# Altium PCB PM_CPUBoard_pcb.PcbDoc
Units mm, origin at the board's own origin, x right, y up, seen from the top; angles counter-clockwise.
Board outline 130 x 70 mm, 2 copper layers (Top Layer, Bottom Layer); 117 components, 88 nets, 359 pads, 65 vias.
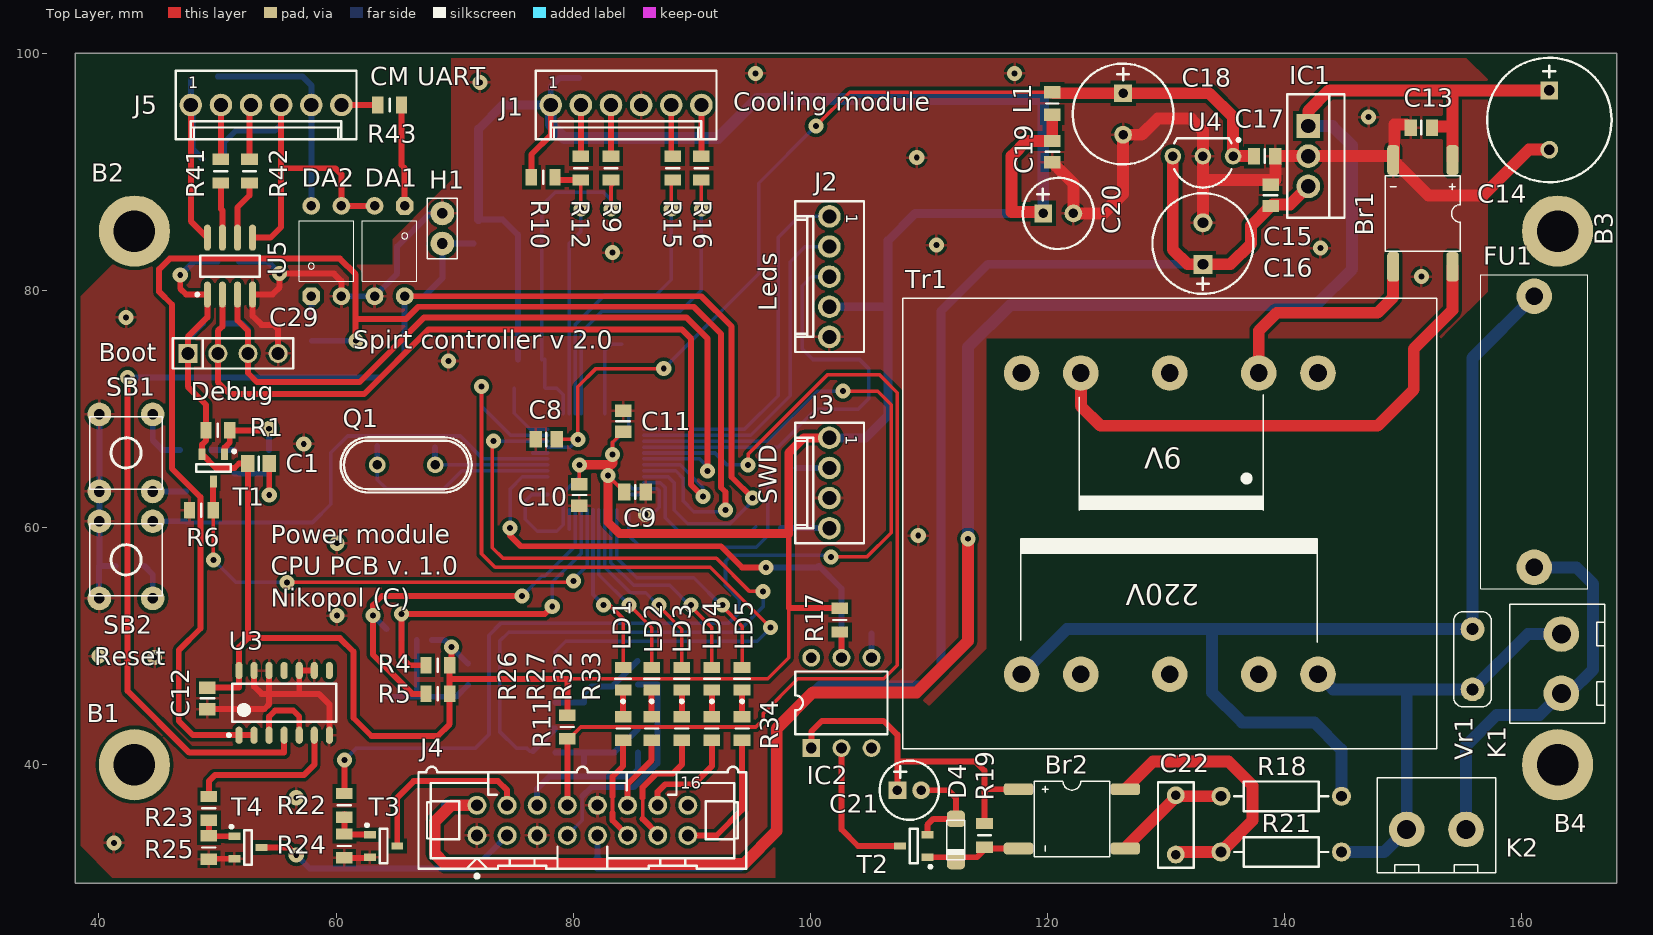
[diagram p0: Top Layer view]
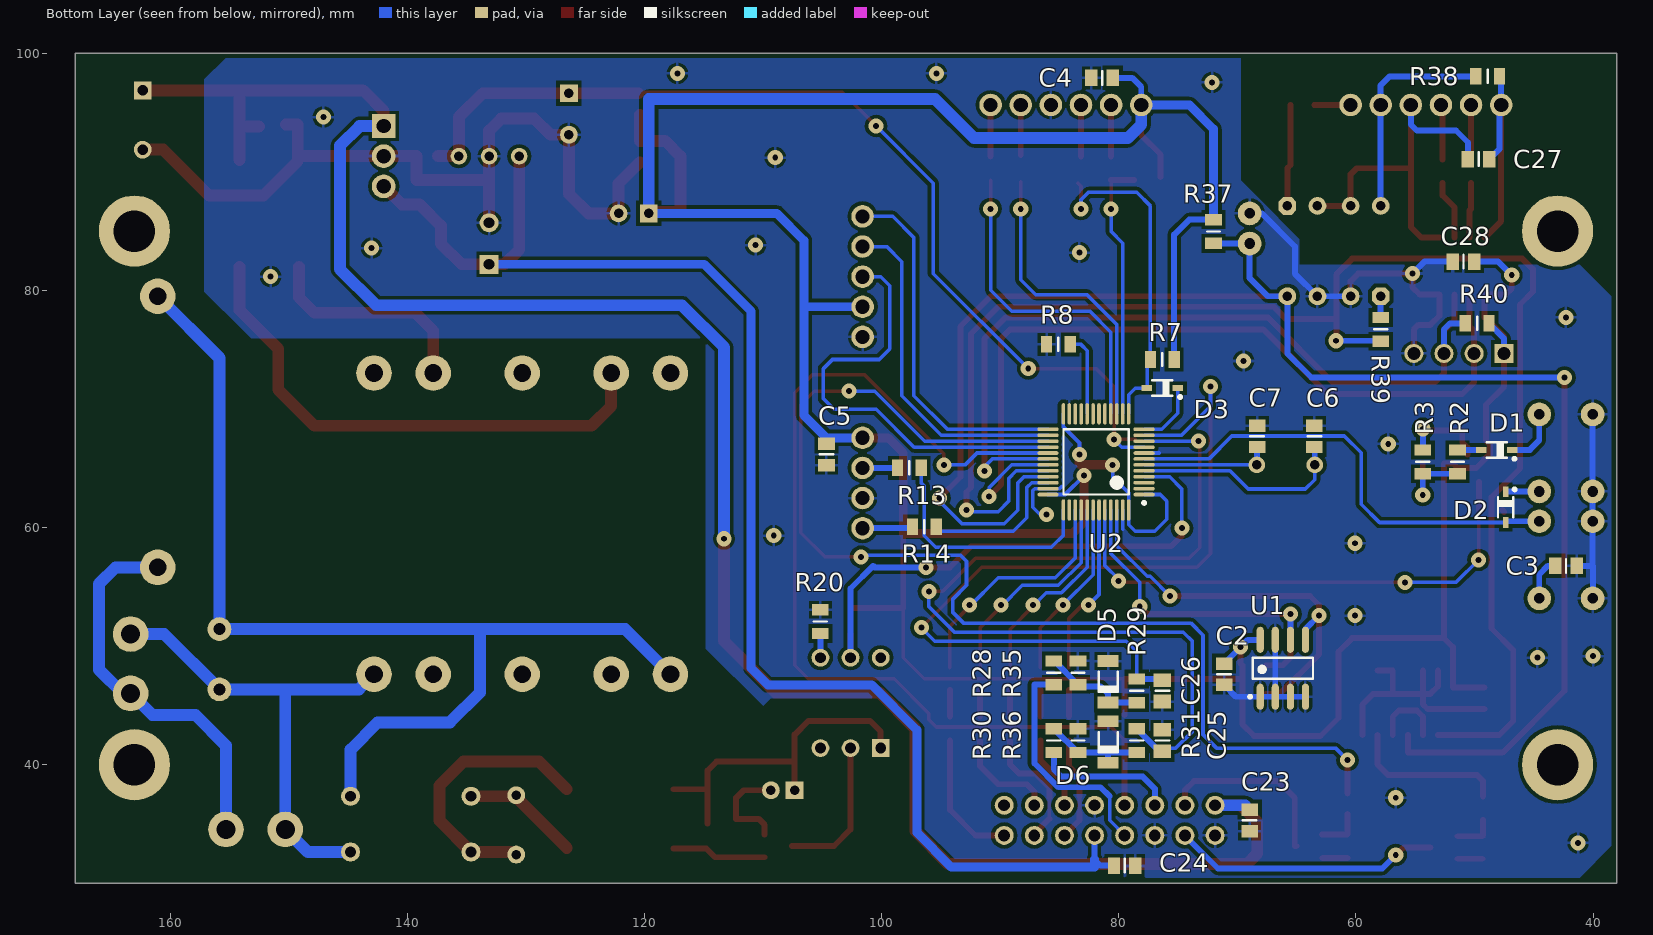
[diagram p1: Bottom Layer view, seen from below]
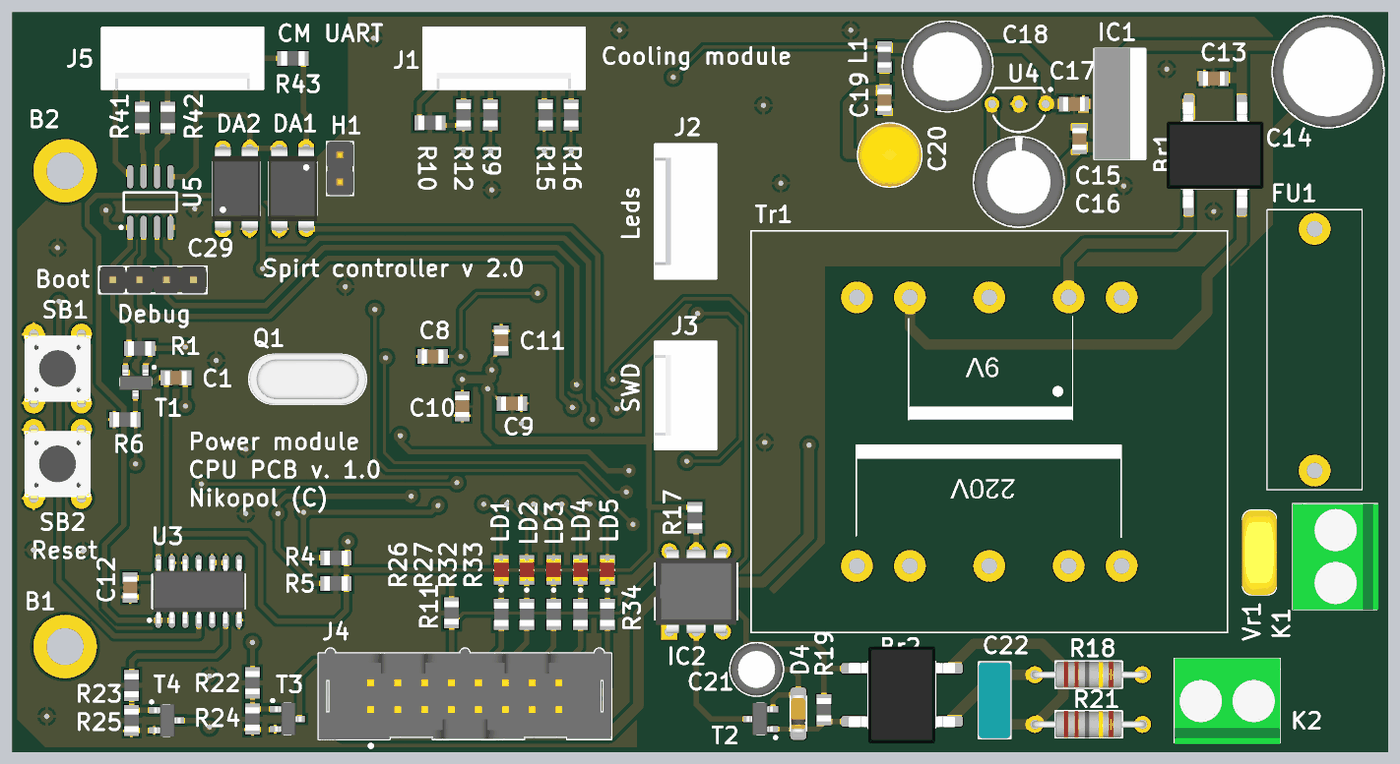
[diagram p2: 3D render of the assembled board from above, using the file's embedded part models]
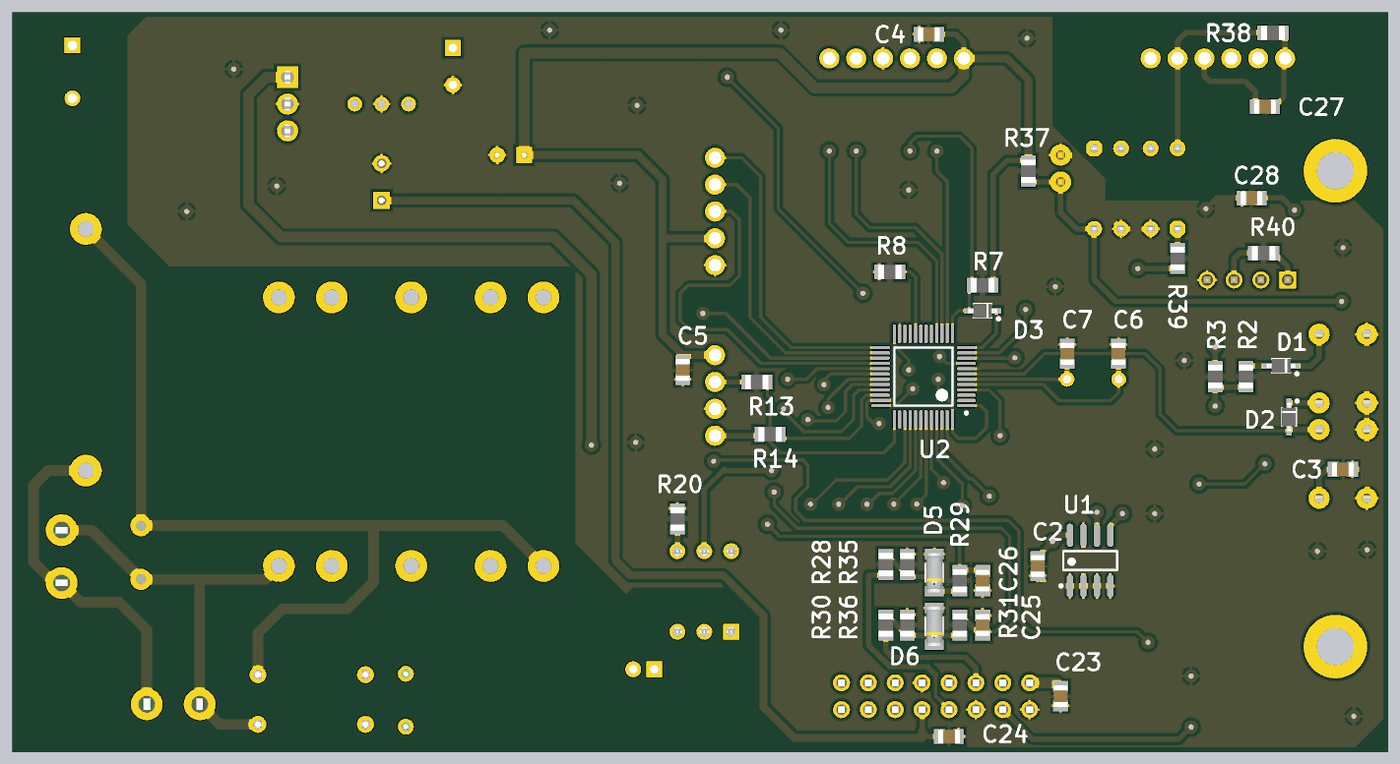
[diagram p3: 3D render of the assembled board from below, using the file's embedded part models]

## Layer stack, top to bottom
Top Solder: solder mask 0.0102, Solder Resist, Dk 3.5
Top Layer: signal copper 0.0356
Dielectric 1: dielectric 0.32, FR-4, Dk 4.8
Bottom Layer: signal copper 0.0356
Bottom Solder: solder mask 0.0102, Solder Resist, Dk 3.5

## Board outline
38,30 168,30 168,100 38,100

## Design rules (kind name [scope] priority, off if disabled: settings)
Clearance Clearance_2 [InNamedPolygon('Top Layer-GND') or  InNamedPolygon('Bottom Layer-GND')] p1: gap=0.3
Clearance Clearance_1 [HasFootprint('STM-LQFP48_N')] p2: gap=0.127
Clearance [All] p3: gap=0.2
Height [All] p1: minheight=0 maxheight=50 prefheight=12.7
HoleSize [All] p1: absolutevalues=TRUE maxlimit=6 minlimit=0.5 maxpercent=80.000 minpercent=20.000
MinimumSolderMaskSliver [All] p1: minsoldermaskwidth=0
PolygonConnect [All] p1: connectstyle=Relief reliefconductorwidth=0.254 reliefentries=4 polygonreliefangle="90 Angle" airgapwidth=0.254
RoutingVias [All] p1: holewidth=0.711 width=1.27 viastyle="Through Hole" minholewidth=0.711 minwidth=1.27 maxholewidth=0.711 maxwidth=1.27
SilkToSilkClearance [All] p1: silktosilkclearance=0
SilkToSolderMaskClearance [IsPad] p1: minsilkscreentomaskgap=0 clearancetoexposedcopper=TRUE
SolderMaskExpansion [All] p1: expansion=0.102
UnpouredPolygon [All] p1: allowunpoured=FALSE
Width [All] p1: maxlimit=5 minlimit=0.254 preferedwidth=0.254
24 further rules are at their usual default settings.

## Classes and differential pairs
component class ControlBoard_p2: Br1 Br2 C13 C14 C15 C16 C17 C18 C19 C20 C21 C22 C23 C24 C25 C26 C27 C28 C29 D4 D5 D6 DA1 DA2 FU1 IC1 IC2 J4 J5 K1 K2 L1 LD1 LD2 LD3 LD4 LD5 R17 R18 R19 R20 R21 R22 R23 R24 R25 R26 R27 R28 R29 R30 R31 R32 R33 R34 R35 R36 R37 R38 R39 R40 R41 R42 R43 T2 T3 T4 Tr1 U4 U5 Vr1
component class ControlBoard_p1: B1 B2 B3 B4 C1 C2 C3 C4 C5 C6 C7 C8 C9 C10 C11 C12 D1 D2 D3 H1 J1 J2 J3 Q1 R1 R2 R3 R4 R5 R6 R7 R8 R9 R10 R11 R12 R13 R14 R15 R16 SB1 SB2 T1 U1 U2 U3

## Components (designator, comment, footprint, x,y, rotation, side; value= is the part's Value field where it differs from the comment)
B1 "Plated Hole" MTG350_650#1 163,40 r0 top
B2 "Plated Hole" MTG350_650#2 172.72,35.052 r0 top
B3 "Plated Hole" MTG350_650#3 180.721,35.052 r0 top
B4 "Plated Hole" MTG350_650#4 188.595,35.052 r0 top
Br1 "DB104-S" DB-S 151.638,86.487 r180 top
Br2 "DB104-S" DB-S 122.047,35.433 r270 top
C1 "1uF" CAPC2012X140N 53.467,65.405 r180 top
C2 "100nF" CAPC2012X135N 71.12,47.625 r90 bottom
C3 "100nF" CAPC2012X135N 42.291,56.769 r0 bottom
C4 "100nF" CAPC2012X135N 81.407,97.917 r180 bottom
C5 "100nF" CAPC2012X135N 104.648,66.167 r90 bottom
C6 "22pF" CAPC2012X135N 63.5,67.691 r270 bottom
C7 "22pF" CAPC2012X135N 68.326,67.691 r270 bottom
C8 "100nF" CAPC2012X135N 77.724,67.437 r0 top
C9 "100nF" CAPC2012X135N 85.217,62.992 r180 top
C10 "100nF" CAPC2012X135N 80.518,62.738 r90 top
C11 "100nF" CAPC2012X135N 84.201,68.961 r270 top
C12 "100nF" CAPC2012X135N 49.149,45.593 r90 top
C13 "100nF" CAPC2012X135N 151.511,93.726 r0 top
C14 "470uF" CAPPR500-1050X2200 162.306,94.361 r270 top
C15 "100nF" CAPC2012X135N 138.811,88.011 r270 top
C16 "220uF" CAPPR350-850X1300 133.096,83.947 r90 top
C17 "100nF" CAPC2012X135N 138.303,91.313 r180 top
C18 "100uF" CAPPR350-850X800 126.365,94.869 r270 top
C19 "100nF" CAPC2012X135N 120.396,91.694 r90 top
C20 "22uF" CAPPRB254-600X990 120.904,86.487 r0 top
C21 "10uF" CAPPR200-500X1100 108.331,37.846 r0 top
C22 "10nF" CAPR500-300X720X650 130.81,34.925 r90 top
C23 "100nF" CAPC2012X135N 68.961,35.306 r90 bottom
C24 "100nF" CAPC2012X135N 79.502,31.496 r0 bottom
C25 "470nF" CAPC2012X110N 76.327,46.228 r90 bottom
C26 "470nF" CAPC2012X110N 76.327,42.037 r270 bottom
C27 "100nF" CAPC2012X135N 49.657,91.059 r0 bottom
C28 "100nF" CAPC2012X135N 50.927,82.423 r0 bottom
C29 "WE-2.54 mm Pin Header & Jumper 61300411121" 61300411121 47.498,74.676 r0 top
D1 "BAS416" SOD2512X110N 48.133,66.548 r0 bottom
D2 "BAS416" SOD2512X110N 47.371,61.722 r270 bottom
D3 "BAS416" SOD2512X110N 76.327,71.755 r0 bottom
D4 "LL4148" SOD80/MLL34 112.268,33.655 r270 top
D5 "BZV55-B3V6" DIOMELF3515N 80.899,46.99 r90 bottom
D6 "BZV55-B3V6" DIOMELF3515N 80.899,41.91 r90 bottom
DA1 "LTV817" DIL4-300a 64.516,83.312 r180 top
DA2 "LTV817" DIL4-300a 59.182,83.312 r0 top
FU1 "Fuse-PTF15" FUSE-MCH 161.036,68.072 r270 top
H1 "H-1x2" J1x2 68.961,85.217 r90 top
IC1 "LM7805CT" TO-220-V 141.986,91.313 r270 top
IC2 "4N35V" DIP6-300 102.616,45.212 r90 top
J1 "KK®" MOLEX_22-27-2061 84.455,95.631 r0 top
J2 "KK®" MOLEX_22-27-2051 101.6,81.153 r270 top
J3 "KK®" MOLEX_22-27-2041 101.6,63.754 r270 top
J4 "Header 16" 3M_N2516-6002RB 80.772,35.306 r0 top
J5 "KK®" MOLEX_22-27-2061 54.102,95.631 r0 top
K1 "TS-501 2P" "TS-501 2P-2.5" 163.322,48.514 r90 top
K2 "TS-501 2P" "TS-501 2P-2.5" 152.781,34.544 r0 top
L1 "600R@100MHz" INDC2012X110N 120.396,95.758 r270 top
LD1 "Super Red" LED_OSRAM_LSR976 84.201,47.244 r90 top
LD2 "Super Red" LED_OSRAM_LSR976 86.614,47.244 r90 top
LD3 "Super Red" LED_OSRAM_LSR976 89.154,47.244 r90 top
LD4 "Super Red" LED_OSRAM_LSR976 91.694,47.244 r90 top
LD5 "Super Red" LED_OSRAM_LSR976 94.234,47.244 r90 top
Q1 "8MHz" XTAL_HC-49/U-S 65.913,65.278 r0 top
R1 "47k" RESC2012X60N 50.038,68.199 r180 top
R2 "100" RESC2012X60N 51.435,65.532 r270 bottom
R3 "47k" RESC2012X60N 54.356,65.532 r90 bottom
R4 "4k7" RESC2012X60N 68.58,48.387 r0 top
R5 "4k7" RESC2012X60N 68.58,45.974 r0 top
R6 "4k7" RESC2012X60N 48.641,61.468 r0 top
R7 "4k7" RESC2012X60N 76.327,74.168 r180 bottom
R8 "0" RESC2012X60N 85.09,75.438 r0 bottom
R9 "220" RESC2012X60N 83.185,90.297 r270 top
R10 "4k7" RESC2012X60N 77.47,89.535 r180 top
R11 "10k" RESC2012X60N 79.502,43.18 r90 top
R12 "220" RESC2012X60N 80.645,90.297 r270 top
R13 "22" RESC2012X60N 97.663,65.024 r0 bottom
R14 "22" RESC2012X60N 96.393,60.071 r0 bottom
R15 "220" RESC2012X60N 88.392,90.297 r270 top
R16 "220" RESC2012X60N 90.805,90.297 r270 top
R17 "4k7" RESC2012X60N 102.489,52.197 r90 top
R18 "220k" RES1016-630X250 139.7,37.338 r180 top
R19 "22k" RESC2012X60N 114.681,34.036 r90 top
R20 "100" RESC2012X60N 105.156,52.07 r270 bottom
R21 "220k" RES1016-630X250 139.7,32.639 r180 top
R22 "2k7" RESC2012X60N 60.706,36.576 r90 top
R23 "2k7" RESC2012X60N 49.276,36.322 r90 top
R24 "10k" RESC2012X60N 60.706,33.147 r90 top
R25 "10k" RESC2012X60N 49.276,33.02 r90 top
R26 "100" RESC2012X60N 84.201,43.053 r90 top
R27 "100" RESC2012X60N 86.614,43.053 r90 top
R28 "1k2" RESC2012X60N 85.471,47.752 r90 bottom
R29 "5k6" RESC2012X60N 78.486,46.228 r90 bottom
R30 "1k2" RESC2012X60N 85.471,42.037 r90 bottom
R31 "5k6" RESC2012X60N 78.486,42.037 r90 bottom
R32 "100" RESC2012X60N 89.154,43.053 r90 top
R33 "100" RESC2012X60N 91.694,43.053 r90 top
R34 "100" RESC2012X60N 94.234,43.053 r90 top
R35 "2k32" RESC2012X60N 83.439,47.752 r270 bottom
R36 "2k32" RESC2012X60N 83.439,42.037 r270 bottom
R37 "4k7" RESC2012X60N 72.009,84.963 r90 bottom
R38 "4k7" RESC2012X60N 48.895,98.044 r180 bottom
R39 "330" RESC2012X60N 57.912,76.708 r270 bottom
R40 "47k" RESC2012X60N 49.784,77.216 r180 bottom
R41 "330" RESC2012X60N 50.292,90.043 r270 top
R42 "330" RESC2012X60N 52.705,90.043 r270 top
R43 "330" RESC2012X60N 64.516,95.631 r0 top
SB1 "TS-06" TS-06 42.291,66.294 r0 top
SB2 "TS-06" TS-06 42.291,57.277 r0 top
T1 "BC857B" SOT95P230X110-3N 49.657,65.024 r270 top
T2 "MMBT3904" SOT95P230X110-3N 108.712,33.147 r180 top
T3 "BC817" SOT95P230X110-3N 64.008,33.147 r0 top
T4 "BC817" SOT95P230X110-3N 52.578,33.02 r0 top
Tr1 "V42AJ-15ADP7" TR220-6W 130.302,60.325 r270 top
U1 "AT24C08BN-SP25-B" 8S1_N 66.167,48.133 r90 bottom
U2 "STM32F100C8T6B" STM-LQFP48_N 81.915,65.532 r0 bottom
U3 "SN74HC00D" D0014A_N 55.626,45.212 r90 top
U4 "LP2950ACZ-3.3" LP3 133.096,91.313 r90 top
U5 "ADUM1201ARZ" ADI-R-8_N 51.054,82.042 r90 top
Vr1 "Var 7K391" VAR-7K-200 155.829,48.895 r270 top

## Footprints (in the part's own frame and the unit in brackets; to place one, negate y for a bottom-side part, rotate by r counter-clockwise, add the part's x,y. Pads: shape width x height; smd on the part's side, far side on the other; paste and mask are expansions set on the pad)
3M_N2516-6002RB [mm] "16 Contacts - Straight .100\" x .100\" Low Profile Four-Wall Header"
  round 1.6 hole 1: 1(-8.89,-1.27) 2(-8.89,1.27) 3(-6.35,-1.27) 4(-6.35,1.27) 5(-3.81,-1.27) 6(-3.81,1.27) 7(-1.27,-1.27) 8(-1.27,1.27) 9(1.27,-1.27) 10(1.27,1.27) 11(3.81,-1.27) 12(3.81,1.27) 13(6.35,-1.27) 14(6.35,1.27) 15(8.89,-1.27) 16(8.89,1.27)
  silkscreen extent -13.82,-4.85 13.82,4.52, body extent -13.82,-4.17 13.82,4.52, height 9.65
8S1_N [mm] "SOIC, 8-Leads, Body 4.9x3.9mm, Pitch 1.27mm, IPC Medium Density"
  oval 2.2x0.6 smd: 1(-2.4,1.905) 2(-2.4,0.635) 3(-2.4,-0.635) 4(-2.4,-1.905) 5(2.4,-1.905) 6(2.4,-0.635) 7(2.4,0.635) 8(2.4,1.905)
  silkscreen extent -2.52,-2.55 0.9,2.88, body extent -1.99,-2.52 1.99,2.52, height 1.75
61300411121 [mm] "4 pins, 1 row, straight, gold plating"
  rect 1.6x1.6 hole 1.1: 1(0,0)
  round 1.6 hole 1.1: 2(2.54,0) 3(5.08,0) 4(7.62,0)
  silkscreen extent -1.27,-1.27 8.89,1.27, body extent -1.27,-1.27 8.89,1.27, height 8.54
ADI-R-8_N [mm] "SOIC, 8-Leads, Body 4.9x3.9mm, Pitch 1.27mm, IPC Medium Density"
  oval 2.2x0.6 smd: 1(-2.4,1.905) 2(-2.4,0.635) 3(-2.4,-0.635) 4(-2.4,-1.905) 5(2.4,-1.905) 6(2.4,-0.635) 7(2.4,0.635) 8(2.4,1.905)
  silkscreen extent -2.52,-2.5 0.9,2.88, body extent -2,-2.5 2,2.5, height 1.75
CAPC2012X110N [mm] "Chip Capacitor, Body 2.0x1.25mm, IPC Medium Density"
  rect 1.15x1.45 smd: 1(-0.9,0) 2(0.9,0)
  silkscreen extent 0,-0.58 0,0.58, body extent -1.05,-0.67 1.05,0.68, height 1.1
CAPC2012X135N [mm] "Chip Capacitor, Body 2.0x1.25mm, IPC Medium Density"
  rect 1.05x1.4 smd: 1(-0.9,0) 2(0.9,0)
  silkscreen extent 0,-0.58 0,0.58, body extent -1.05,-0.67 1.05,0.68, height 1.25
CAPC2012X140N [mm] "Chip Capacitor, Body 2.0x1.25mm, IPC Medium Density"
  rect 1.15x1.45 smd: 1(-0.9,0) 2(0.9,0)
  silkscreen extent 0,-0.58 0,0.58, body extent -1.05,-0.67 1.05,0.68, height 1.3
CAPPR200-500X1100 [mm] "Capacitor, Radial, Pin spacing 2.0mm - Body Diameter 5.0mm X Body Height 11mm"
  rect 1.5x1.5 hole 0.8: 1(-1,0)
  round 1.5 hole 0.8: 2(1,0)
  silkscreen extent -2.5,-2.5 2.5,2.5, body extent -2.51,-2.51 2.49,2.49, height 10.9
CAPPR350-850X800 [mm] "Capacitor, Radial, Pin spacing 3.5mm - Body Diameter 8.5mm x Body Height 8.0mm"
  rect 1.5x1.5 hole 0.8: 1(-1.75,0)
  round 1.5 hole 0.8: 2(1.75,0)
  silkscreen extent -4.25,-4.25 4.25,4.25, body extent -4.25,-4.25 4.25,4.25, height 8
CAPPR350-850X1300 [mm] "Capacitor, Radial, Pin spacing 3.5mm - Body Diameter 8.5mm x Body Height 13mm"
  rect 1.6x1.6 hole 0.9: 1(-1.75,0)
  round 1.6 hole 0.9: 2(1.75,0)
  silkscreen extent -4.25,-4.25 4.25,4.25, body extent -4.25,-4.25 4.25,4.25, height 13
CAPPR500-1050X2200 [mm] "Capacitor, Radial, Pin spacing 5.0mm - Body Diameter 10.5mm X Body Height 22mm"
  rect 1.5x1.5 hole 0.9: 1(-2.5,0)
  round 1.5 hole 0.9: 2(2.5,0)
  silkscreen extent -5.25,-5.25 5.25,5.25, body extent -5.25,-5.23 5.25,5.23, height 22
CAPPRB254-600X990 [mm] "Capacitor, Polarized Radial Bead, Pin spacing 2.54mm - Body Diameter 6.0mm X Body Height 9.9mm"
  rect 1.5x1.5 hole 0.8: 1(-1.27,0)
  round 1.5 hole 0.8: 2(1.27,0)
  silkscreen extent -3,-3 3,3, body extent -3,-2.98 3,2.98, height 9.9
CAPR500-300X720X650 [mm] "Capacitor Radial, Pin spacing 5.0mm - Body With 3.0mm X Body Length 7.2mm X Body Height 6.5mm"
  round 1.5 hole 0.8: 1(-2.5,0) 2(2.5,0)
  silkscreen extent -3.6,-1.5 3.6,1.5, body extent -3.6,-1.5 3.6,1.5, height 6.5
D0014A_N [mm] "SOIC, 14-Leads, Body 8.75x4mm, Pitch 1.27mm, IPC Medium Density"
  oval 1.45x0.6 smd: 1(-2.725,3.81) 2(-2.725,2.54) 3(-2.725,1.27) 4(-2.725,0) 5(-2.725,-1.27) 6(-2.725,-2.54) 7(-2.725,-3.81) 8(2.725,-3.81) 9(2.725,-2.54) 10(2.725,-1.27) 11(2.725,0) 12(2.725,1.27) 13(2.725,2.54) 14(2.725,3.81)
  silkscreen extent -2.85,-4.37 1.6,4.78, body extent -3.02,-4.32 3.02,4.32, height 1.59
DB-S [mm] "SMD 5mm x 9mm"
  rrect50% 1x2.5 smd: 1(-2.5,-4.5) 2(2.5,-4.5) 3(2.5,4.5) 4(-2.5,4.5)
  silkscreen extent -3.18,-3.18 3.18,3.18, body extent -4.58,-5.03 4.57,5.02, height 3.35
DIL4-300a [mm]
  oct 1.5x1.5 hole 0.8: 1(-1.27,-3.81)
  round 1.5 hole 0.8: 2(1.27,-3.81) 3(1.27,3.81) 4(-1.27,3.81)
  silkscreen extent -2.29,-2.54 2.29,2.54, body extent -2.29,-3.96 2.29,3.96, height 4.25
DIOMELF3515N [mm] "SOD80C, MELF Diode, 2-Leads, Body 3.5x1.5mm, IPC Medium Density"
  rect 1x1.75 smd: 1(-1.75,0) 2(1.75,0)
  silkscreen extent -0.85,-0.8 0.85,0.8, body extent -1.85,-0.8 1.85,0.8, height 1.6
DIP6-300 [mm] "DIP 6 Leads, Row Spacing 7.62 mm; Pitch 2.54 mm"
  rect 1.5x1.5 hole 0.9: 1(-3.81,2.54)
  round 1.5 hole 0.9: 2(-3.81,0) 3(-3.81,-2.54) 4(3.81,-2.54) 5(3.81,0) 6(3.81,2.54)
  silkscreen extent -2.65,-3.88 2.65,3.88, body extent -3.93,-3.81 3.94,3.81, height 5.33
FUSE-MCH [mm]
  round 3 hole 1.5: 1(-11.43,0) 2(11.43,0)
  silkscreen extent -13.25,-4.5 13.25,4.5, body extent -13.25,-4.5 13.25,4.5, height 15.5
INDC2012X110N [mm] "Chip Inductor, EIA 0805, Metric 2012, Body 2.0x1.2mm, IPC Medium Density"
  rect 1.05x1.4 smd: 1(-0.95,0) 2(0.95,0)
  silkscreen extent 0,-0.53 0,0.53, body extent -1,-0.62 1,0.63, height 1.1
J1x2 [mm]
  round 2 hole 0.9: 1(-1.27,0) 2(1.27,0)
  silkscreen extent -2.54,-1.27 2.54,1.27, body extent -2.54,-1.27 2.54,1.27, height 10.1
LED_OSRAM_LSR976 [mm] "Super Red Chip LED, 2-Leads, Body 2.0x1.25mm, IPC Medium Density"
  rect 0.9x1.4 smd: 1(-0.95,0) 2(0.95,0)
  silkscreen extent -2.02,-0.65 0,0.65, body extent -1.05,-0.67 1.05,0.68, height 0.9
LP3 [mm] "TO, Flat Index; 3 In-Line, Formed Axial Leads; Body Dia. 4.8mm; Leads 0.56 x 0.41 mm (max)"
  round 1.4 hole 0.8: 1(0,-2.54) 2(0,0) 3(0,2.54)
  silkscreen extent -2.65,-3.13 1.52,2.41, body extent -2.66,-2.66 1.52,2.66, height 9.33
MOLEX_22-27-2041 [mm] "2.54mm (.100\") Pitch KK® Header, Single Row, Vertical, 4 Circuits"
  round 1.9 hole 1.2: 1(-3.81,0) 2(-1.27,0) 3(1.27,0) 4(3.81,0)
  silkscreen extent -5.08,-2.88 5.08,2.92, body extent -5.08,-2.88 5.08,2.92, height 11.7
MOLEX_22-27-2051 [mm] "2.54mm (.100\") Pitch KK® Header, Single Row, Vertical, 5 Circuits"
  round 1.9 hole 1.2: 1(-5.08,0.005) 2(-2.54,0) 3(0,0) 4(2.54,0) 5(5.08,0)
  silkscreen extent -6.35,-2.88 6.35,2.92, body extent -6.35,-2.88 6.35,2.92, height 11.7
MOLEX_22-27-2061 [mm] "2.54mm (.100\") Pitch KK® Header, Single Row, Vertical, 6 Circuits"
  round 1.9 hole 1.2: 1(-6.35,0) 2(-3.81,0) 3(-1.27,0) 4(1.27,0) 5(3.81,0) 6(6.35,0)
  silkscreen extent -7.62,-2.9 7.62,2.9, body extent -7.62,-2.9 7.62,2.9, height 11.7
MTG350_650#1 [mm] "Plated Through Hole: Hole Dia.=3.5mm Pad Dia.=6.5mm"
  round 6 hole 3.5: 1(-120,0)
MTG350_650#2 [mm] "Plated Through Hole: Hole Dia.=3.5mm Pad Dia.=6.5mm"
  round 6 hole 3.5: 1(-129.72,49.948)
MTG350_650#3 [mm] "Plated Through Hole: Hole Dia.=3.5mm Pad Dia.=6.5mm"
  round 6 hole 3.5: 1(-17.721,49.948)
MTG350_650#4 [mm] "Plated Through Hole: Hole Dia.=3.5mm Pad Dia.=6.5mm"
  round 6 hole 3.5: 1(-25.595,4.948)
RES1016-630X250 [mm] "Resistor, Axial, Pad spacing 10.16 mm - Body Lengh 6.3mm X Body Diameter 2.5mm"
  round 1.6 hole 0.9: 1(-5.08,0) 2(5.08,0)
  silkscreen extent -3.95,-1.25 3.95,1.25, body extent -5.38,-1.27 5.38,1.26, height 2.51
RESC2012X60N [mm] "Chip Resistor, EIA 0805, Metric 2012, Body 2.0x1.2mm, IPC Medium Density"
  rect 0.95x1.4 smd: 1(-1,0) 2(1,0)
  silkscreen extent 0,-0.55 0,0.55, body extent -1.1,-0.67 1.1,0.68, height 0.6
SOD80/MLL34 [mil]
  rrect50% 55x60 smd: 1(-70,0) 2(70,0)
  silkscreen extent -65,-30 65,30, body extent -69,-28 69,27, height 55
SOD2512X110N [mm] "Small Outline Diode Flat Lead (SOD-323), 1.70mm W X 1.25mm L X 1.10mm H body,  IPC Medium Density"
  rect 0.9x0.5 smd: 1(-1.3,0) 2(1.3,0)
  silkscreen extent -1.62,-0.65 0.85,0.87, body extent -1.35,-0.67 1.35,0.68, height 1.1
SOT95P230X110-3N [mm] "SOT23, 3 pin, Pitch 0.95mm - 1.3mm W X 2.9mm L X 1.1mm H, IPC Medium Density"
  rect 1x0.6 smd: 1(-1.15,0.95) 2(-1.15,-0.95) 3(1.15,0)
  silkscreen extent -1.52,-1.45 0.33,1.88, body extent -1.17,-1.5 1.33,1.5, height 1.1
STM-LQFP48_N [mm] "QFP, 48-Leads, Body 7x7mm, Pitch 0.5mm, IPC Medium Density"
  oval 1.8x0.3 smd: 1(-4.05,2.75) 2(-4.05,2.25) 3(-4.05,1.75) 4(-4.05,1.25) 5(-4.05,0.75) 6(-4.05,0.25) 7(-4.05,-0.25) 8(-4.05,-0.75) 9(-4.05,-1.25) 10(-4.05,-1.75) 11(-4.05,-2.25) 12(-4.05,-2.75) 25(4.05,-2.75) 26(4.05,-2.25) 27(4.05,-1.75) 28(4.05,-1.25) 29(4.05,-0.75) 30(4.05,-0.25) 31(4.05,0.25) 32(4.05,0.75) 33(4.05,1.25) 34(4.05,1.75) 35(4.05,2.25) 36(4.05,2.75)
  oval 0.3x1.8 smd: 13(-2.75,-4.05) 14(-2.25,-4.05) 15(-1.75,-4.05) 16(-1.25,-4.05) 17(-0.75,-4.05) 18(-0.25,-4.05) 19(0.25,-4.05) 20(0.75,-4.05) 21(1.25,-4.05) 22(1.75,-4.05) 23(2.25,-4.05) 24(2.75,-4.05) 37(2.75,4.05) 38(2.25,4.05) 39(1.75,4.05) 40(1.25,4.05) 41(0.75,4.05) 42(0.25,4.05) 43(-0.25,4.05) 44(-0.75,4.05) 45(-1.25,4.05) 46(-1.75,4.05) 47(-2.25,4.05) 48(-2.75,4.05)
  silkscreen extent -4.17,-2.75 2.75,3.57, body extent -3.5,-3.5 3.5,3.5, height 1.6
TO-220-V [mm] "TO-220 3-Terminal - Vertical Mount"
  rect 2x2 hole 1.2: 1(-2.54,0)
  round 2 hole 1.2: 2(0,0) 3(2.54,0)
  silkscreen extent -5.21,-1.78 5.21,3.05, body extent -5.27,-1.75 5.27,2.95, height 20.5
TR220-6W [mm]
  round 3 hole 1.5: 1(12.7,-12.5) 2(12.7,-7.5) 3(12.7,0) 4(12.7,7.5) 5(12.7,12.5) 6(-12.7,-12.5) 7(-12.7,-7.5) 8(-12.7,0) 9(-12.7,7.5) 10(-12.7,12.5)
  silkscreen extent -19,-22.5 19,22.5, body extent -19,-22.5 19,22.5, height 34.5
TS-06 [mm]
  round 2 hole 0.9: 1(-2.25,-3.25) 1(-2.25,3.25) 2(2.25,-3.25) 2(2.25,3.25)
  silkscreen extent -3.05,-3.05 3.05,3.05, body extent -3,-3.3 3,3.3, height 3.95
"TS-501 2P-2.5" [mm]
  round 3 hole 1.6: 1(-2.5,0) 2(2.5,0)
  silkscreen extent -5,-3.65 5,4.35, body extent -5,-3.75 5,4.35, height 1.5
VAR-7K-200 [mm]
  round 2 hole 1: 1(-2.54,0) 2(2.54,0)
  silkscreen extent -4,-1.6 4,1.6, body extent -4,-1.66 4,1.65, height 11
XTAL_HC-49/U-S [mm] "HC-49/U-S Leaded Cristal, Body 11.5x4.66mm; Pitch 4.88mm"
  round 1.4 hole 0.8: 1(-2.44,0) 2(2.44,0)
  silkscreen extent -5.53,-2.33 5.53,2.33, body extent -5.52,-2.4 5.53,2.4, height 13.6

## Part data
B1 B2 B3 B4: library part PLATED_HOLE3.5_PAD6.5, "Single Terminal Socket"
Br1 Br2: "SMD 1A 400V"
C1: library part CC0805_1UF_35V_20%_X7R, "Non-polarised capacitor"
C2 C3 C4 C5 C8 C9 C10 C11 C12 C13 C15 C17 C19 C23 C24 C27 C28: library part CC0805_100NF_50V_10%_X7R, "Non-polarised capacitor"
C6 C7: library part CC0805_22PF_50V_5%_NP0, "Non-polarised capacitor"
C14: library part CAER_470UF_25V_20%_500-1050X2200_LESR0R062, "Polarised capacitor"
C16: library part CAER_220UF_25V_20%_RUBYCON_25YXF220M8X11.5, "Polarised capacitor"
C18: library part CAER_100UF_25V_20%_RUBYCON_25ML100M8X7, "Polarised capacitor"
C20: library part CTEB_22UF_16V_10%_254-600X990, "Polarised capacitor"
C21: library part CAER_10UF_63V_20%_PANASONIC_ECA1JM100, "Polarised capacitor"
C22: library part CPER_10NF_400V_10%_500-300X720X650, "Non-polarised capacitor"
C25 C26: library part CC0805_470NF_50V_10%_X7R, "Non-polarised capacitor"
C29: "WR-PHD 2.54mm Pin Header"
D1 D2 D3: "Diode"
D4: "75V 0.3A SOD80/MLL34"
D5 D6: "Zener Diode"
FU1: "5mm 6.3A"
IC1: library part LM7805CT_v, "3-Terminal Regulator 1=IN 2=GND 3=OUT"
IC2: library part 4N25V, "Single Optocoupler with Base"
J1 J5: library part MOLEX_22-27-2061, "Connector 6 Male"
J2: library part MOLEX_22-27-2051, "Connector 5 Male"
J3: library part MOLEX_22-27-2041, "Connector 4 Male"
J4: library part 3M_N2516-6002RB, "Connector 16 Male"
K1 K2: "10A/300V AC 5mm"
L1: library part IND0805_WURTH_742792040, "Inductor"
LD1 LD2 LD3 LD4 LD5: library part LED_OSRAM_LSR976, "LED Red 1C 2A"
Q1: library part XTAL_5MHZ_CITIZEN_HC49US5.000MABJ-UB, "Quartz Crystal"
R1 R3 R40: library part R0805_47K_1%_0.125W_100PPM, "Resistor - 1%"
R2: library part R0805_100R_0.1%_0.1W_10PPM, "Resistor - 0.1%"
R4 R5 R6 R7 R10 R17 R37 R38: library part R0805_4K7_1%_0.125W_100PPM, "Resistor - 1%"
R8: library part R0805_0R_JUMPER, "Resistor"
R9 R12 R15 R16: library part R0805_220R_1%_0.125W_100PPM, "Resistor - 1%"
R11 R24 R25: library part R0805_10K_1%_0.125W_100PPM, "Resistor - 1%"
R13 R14: library part R0805_22R_1%_0.125W_100PPM, "Resistor - 1%"
R18 R21: library part RMF_220K_1%_0.6W_50PPM_1016-630X250, "Resistor - 1%"
R19: library part R0805_22K_1%_0.125W_100PPM, "Resistor - 1%"
R20 R26 R27 R32 R33 R34: library part R0805_100R_1%_0.125W_100PPM, "Resistor - 1%"
R22 R23: library part R0805_2K7_1%_0.125W_100PPM, "Resistor - 1%"
R28 R30: library part R0805_1K2_1%_0.125W_100PPM, "Resistor - 1%"
R29 R31: library part R0805_5K6_1%_0.125W_100PPM, "Resistor - 1%"
R35 R36: library part R0805_2K32_0.1%_0.1W_10PPM, "Resistor - 0.1%"
R39 R41 R42 R43: library part R0805_330R_1%_0.125W_100PPM, "Resistor - 1%"
SB1 SB2: library part "Buton TS-06"
T1: "PNP Transistor"
T2 T3 T4: "NPN Transistor"
U1: "8Kbit (1024 x 8), 2-wire Bus Automotive Serial EEPROM with Write Protect, 2.5V, 8-Pin SOIC, Bulk"
U2: "ARM Cortex-M3 32-bit MCU, 64 KB Flash, 8 KB Internal RAM, 37 I/Os, 48-pin LQFP, -40 to 85 degC, Tray"
U3: "Quad 2-Input Positive-NAND Gates, D0014A, TUBE"
U4: library part UA78L02ACLP, "Fixed Regulator with 4.75 to 20 V Input and 2.6 V Output, 0 to 125 degC, 3-Pin TO-92 (LP), Pb-Free (RoHS)"
U5: "Dual Channel Digital Isolator, 2.5 KV rms Insulation Rating, 1 Mbps Data Rate, 150 ns Delay, Industrial, 8-pin SOIC (R-8), Tube"
Vr1: "Варистор 7mm"

## Via types
v1: diameter 1.27, hole 0.5, Top Layer to Bottom Layer, tented both sides, 65 vias

## Nets (pads, with @x,y where several pads share a name; then routed paths per layer and width w, separated by ;. In a path a pad name is that pad's centre, name@x,y a point inside that pad or via, vN(x,y) a via of type N, cw(c..) or ccw(c..) an arc to the next point about the centre after c; other vN are vias at no path point)
+3V3: C1.2 C2.2 C4.2 C5.2 C9.2 C10.2 C11.2 C12.2 C19.2 C20.1 C28.1 C29.1 J1.1 J2.4 J3.1 L1.2 R1.2 R4.2 R5.2 R7.2 R10.2 R11.2 R17.2 R37.2 R40.2 T1.2 U1.8 U2.1 U2.24 U2.36 U2.48 U3.14 U5.1 | length 343.9
  Top Layer w0.3: 79.502,47.244 96.393,47.244 98.171,49.022 98.171,54.61 ; C10.2 v1(80.518,65.278) ; v1(82.931,64.378) C9.2 ; 82.931,65.278 83.185,65.278 ; v1(83.312,66.167) 83.312,67.183 83.323,67.183 C11.2
  Top Layer w0.5: v1(46.863,81.28) 46.863,80.137 47.358,79.642 U5.1 49.149,77.724 47.498,76.073 C29.1 47.498,71.882 49.038,70.342 R1.2 49.038,67.326 48.707,66.995 T1.2 49.857,65.024 51.435,65.024 51.816,65.405 C1.2 52.567,50.673 ; C12.2 51.805,46.493 U3.14@51.805,47.926 ; U3.14 51.816,49.911 52.578,50.673 60.325,50.673 61.468,49.53 61.468,43.942 62.992,42.418 68.58,42.418 69.58,43.418 R5.2 69.58,47.371 ; v1(69.723,49.922) 69.723,48.53 R4.2 69.58,47.371 ; R10.2 76.47,91.456 78.105,93.091 J1.1 ; R11.2 79.502,47.244 69.707,47.244 69.58,47.371 ; 98.171,59.436 98.171,53.197 R17.2
  Top Layer w0.75: v1(82.931,64.378) 82.931,60.452 83.884,59.499 98.108,59.499 98.171,59.436 98.171,66.294 99.441,67.564 J3.1
  Top Layer w0.8: v1(80.518,65.278) 82.931,65.278 v1(82.931,64.378) ; 83.185,65.278 83.312,65.405 v1(83.312,66.167)
  Top Layer w1: C20.1@119.507,86.614 116.967,86.614 116.967,91.313 118.248,92.594 C19.2 L1.2
  Bottom Layer w0.3: U2.1 76.498,62.782 75.946,62.23 75.946,60.706 76.962,59.69 78.613,59.69 79.165,60.242 U2.48 79.165,62.909 80.518,64.262 v1(80.518,65.278) ; v1(82.931,64.378) 84.527,62.782 U2.36 ; v1(83.312,66.167) 83.312,67.125 84.665,68.478 U2.24
  Bottom Layer w0.5: v1(46.863,81.28) 48.006,82.423 C28.1 ; C29.1 47.498,75.93 R40.2 ; U1.8 69.112,50.533 C2.2 ; R37.2 74.057,85.963 75.327,84.693 R7.2 ; J1.1 78.105,97.155 78.867,97.917 C4.2
  Bottom Layer w0.75: R37.2 72.009,93.599 74.041,95.631 J1.1 ; J3.1 104.648,67.564 106.553,69.469 106.553,78.613 ; J2.4 106.553,78.613 ; C20.1 108.839,86.487 106.553,84.201 106.553,78.613
  Bottom Layer w1: J1.1 78.105,93.98 79.248,92.837 92.202,92.837 95.504,96.139 119.634,96.139 C20.1
+3V3A: C8.2 C17.2 C18.1 L1.1 U2.9 U4.1 | length 84.8
  Top Layer w0.3: C8.2 v1(80.391,67.437) 80.391,71.882 81.915,73.406 v1(87.63,73.406) ; v1(100.457,93.853) 103.312,96.708 L1.1
  Top Layer w1: L1.1@120.485,96.619 C18.1 133.632,96.619 135.636,94.615 U4.1 C17.2
  Bottom Layer w0.3: U2.9 79.736,66.782 v1(80.391,67.437) ; v1(87.63,73.406) 95.631,81.407 95.631,89.027 v1(100.457,93.853)
+5V: C15.2 C16.1 C24.2 IC1.3 J4.9 U4.3 | length 122.7
  Top Layer w1: U4.3 130.556,83.439 131.798,82.197 C16.1 135.41,82.197 137.16,83.947 137.16,85.46 C15.2 138.949,87.249 140.462,87.249 IC1.3
  Bottom Layer w0.5: C24.2 81.534,31.496 82.042,32.004 J4.9
  Bottom Layer w0.75: 82.042,32.004 82.042,31.369 94.107,31.369 97.028,34.29 97.028,42.926 100.838,46.736 109.601,46.736 110.998,48.133 110.998,78.232 114.963,82.197 C16.1
+12V: Br1.1 C13.2 C14.1 C23.2 IC1.1 J4.2 | length 172
  Top Layer w1: J4.2 69.723,36.576 68.326,35.179 68.326,32.512 69.215,31.623 94.361,31.623 97.155,34.417 97.155,43.053 100.203,46.101 108.966,46.101 113.284,50.419 v1(113.284,59.055) ; IC1.1 141.986,95.123 143.724,96.861 154.138,96.861 ; C13.2@152.498,93.813 154.138,93.813 ; Br1.1 154.138,93.813 ; C14.1 154.138,96.861 ; 154.138,93.813 154.138,96.861
  Bottom Layer w1: C23.2@69.331,36.576 J4.2 ; v1(113.284,59.055) 113.284,75.184 116.84,78.74 142.621,78.74 145.669,81.788 145.669,92.202 144.018,93.853 IC1.1
D1: R15.2 U2.15 | length 25.5
  Top Layer w0.3: v1@88.265,86.741 R15.2@88.265,89.17
  Bottom Layer w0.3: U2.15 80.165,77.117 82.677,79.629 86.995,79.629 88.265,80.899 v1@88.265,86.741
  other v1: 88.265,86.868
D2: R16.2 U2.16 | length 27.8
  Top Layer w0.3: v1(90.805,86.868) R16.2
  Bottom Layer w0.3: U2.16 80.665,76.474 82.423,78.232 89.027,78.232 90.805,80.01 v1(90.805,86.868)
GND: Br1.2 C2.1 C3.1 C4.1 C5.1 C6.1 C7.1 C8.1 C9.1 C10.1 C11.1 C12.1 C13.1 C14.2 C15.1 C16.2 C17.1 C18.2 C19.1 C20.2 C23.1 C24.1 C25.1 C26.1 C28.2 C29.4 D5.2 D6.2 DA1.3 DA2.2 H1.2 IC1.2 J1.4 J2.5 J3.3 J4.1 J4.5 J4.10 R6.1 R8.2 R20.1 R24.1 R25.1 R35.1 R36.1 SB1.1 SB2.1 T3.2 T4.2 U1.1 U1.2 U1.3 U1.4 U1.7 U2.8 U2.23 U2.35 U2.47 U3.7 U3.9 U3.10 U3.12 U3.13 U4.2 U5.4 | length 164.4
  Top Layer w0.5: R6.1@47.498,61.325 R6.1 ; C12.1 53.964,44.693 54.356,45.085 54.356,45.974 ; R25.1@49.326,32.07 T4.2 ; U3.13 53.086,46.609 53.721,45.974 54.356,45.974 ; U3.12 54.356,45.974 ; C29.4 55.118,76.708 54.737,77.089 53.721,77.089 52.959,77.851 U5.4 54.623,79.642 55.245,80.264 v1(55.245,81.407) 59.817,81.407 60.452,80.772 DA2.2 ; U3.9 U3.10 56.896,45.974 ; U3.7 59.436,45.085 58.547,45.974 56.896,45.974 ; R24.1 T3.2@62.808,32.147 ; 54.356,45.974 56.896,45.974
  Top Layer w1: C19.1 122.174,89.016 C20.2 124.714,86.487 126.365,88.138 C18.2 127.917,93.119 129.286,94.488 132.08,94.488 133.096,93.472 U4.2 ; C16.2 133.096,89.281 ; U4.2@133.118,91.291 133.118,89.303 139.203,89.303 C17.1 IC1.2 Br1.2@148.812,91.313 ; C13.1@150.241,93.98 149.225,93.98 149.225,90.9 152.114,88.011 156.718,88.011 160.568,91.861 C14.2
  Bottom Layer w0.3: 76.593,66.282 U2.8 ; 79.665,59.853 U2.47 ; 84.834,63.44 84.992,63.282 U2.35 87.086,63.282 87.249,63.119 87.249,61.722 86.614,61.087 v1(86.106,61.087)
  Bottom Layer w0.5: SB2.1@40.005,54.063 40.005,56.769 C3.1 ; 40.041,56.805 40.041,60.527 40.041,63.044 SB1.1@40.041,69.544 ; C28.2 54.229,82.423 v1(55.245,81.407) ; DA2.2 DA1.3 65.151,81.407 65.151,83.693 67.945,86.487 ; U1.4 U1.3 U1.2 ; U1.7 U1.2 ; C2.1 70.128,45.733 U1.1 U1.2
  other v1: 41.275,33.401 56.642,37.211 44.704,49.022 40.005,49.149 60.071,52.578 60.071,58.674 109.093,59.309 57.277,67.056 69.469,74.041 42.291,77.724 151.511,81.153 83.312,83.185 143.002,83.566 110.617,83.82 108.966,91.186 147.066,94.615 72.136,97.536 95.377,98.298 117.221,98.298
GNDP: C27.2 DA1.2 DA2.3 J5.4 U5.5 | length 32.3
  Top Layer w0.5: U5.5 54.47,84.442 55.372,85.344 55.372,90.297 ; J5.4 55.372,90.297 ; DA1.2 DA2.3 60.452,89.789 59.944,90.297 55.372,90.297
  Bottom Layer w0.5: C27.2 50.557,92.467 51.562,93.472 54.864,93.472 55.372,93.98 J5.4
NetBr1_3: Br1.3 Tr1.9 | length 18.6
  Top Layer w1: Tr1.9 137.802,76.588 139.319,78.105 147.828,78.105 149.138,79.415 Br1.3
NetBr1_4: Br1.4 Tr1.7 | length 44.5
  Top Layer w1: Tr1.7 122.802,70.238 124.46,68.58 147.828,68.58 150.876,71.628 150.876,75.057 154.138,78.319 Br1.4
NetBr2_1: Br2.1 C21.1 IC2.1 R19.2 | length 29.2
  Top Layer w0.5: IC2.1 100.076,42.799 100.965,43.688 106.172,43.688 107.331,42.529 107.331,40.259 ; C21.1 107.331,40.259 ; R19.2 114.681,37.846 ; Br2.1 114.768,37.933 114.681,37.846 ; 107.331,40.259 113.919,40.259 114.681,39.497 114.681,37.846
NetBr2_2: Br2.2 D4.2 R19.1 T2.1 | length 8
  Top Layer w0.5: T2.1 114.048,32.197 114.784,32.933 Br2.2
NetBr2_3: Br2.3 C22.2 R18.2 | length 9.9
  Top Layer w1: Br2.3@126.547,32.988 130.897,37.338 R18.2
NetBr2_4: Br2.4 C22.1 R21.2 | length 22.8
  Top Layer w1: Br2.4 128.873,40.259 135.255,40.259 137.287,38.227 137.287,35.306 R21.2 C22.1@131.024,32.639
NetC1_1: C1.1 R2.2 R3.1 | length 7.4
  Top Layer w0.5: v1(54.367,62.749) C1.1
  Bottom Layer w0.5: R2.2 R3.1 ; v1@54.356,62.76 v1(54.367,62.749) R3.1@54.367,64.521
NetC3_2: C3.2 D2.2 SB2.2 U2.7 | length 42.6
  Bottom Layer w0.3: D2.2 58.009,60.422 59.563,61.976 59.563,66.294 60.985,67.716 70.46,67.716 72.394,65.782 U2.7
  Bottom Layer w0.5: 43.815,56.769 44.541,56.043 SB2.2@44.541,54.027 ; SB2.2@44.541,60.527 D2.2@47.266,60.527
NetC6_2: C6.2 Q1.1 U2.5 | length 18.2
  Bottom Layer w0.3: Q1.1 63.473,64.035 64.262,63.246 69.088,63.246 70.624,64.782 U2.5
  Bottom Layer w0.5: Q1.1 C6.2@63.473,66.891
NetC7_2: C7.2 Q1.2 U2.6 | length 11.1
  Bottom Layer w0.3: Q1.2@68.357,65.282 U2.6
  Bottom Layer w0.5: Q1.2@68.353,65.151 Q1.2 C7.2@68.353,66.764
NetC21_2: C21.2 D4.1 T2.2 | length 8.4
  Top Layer w0.5: C21.2 111.633,37.846 112.268,37.211 D4.1 110.363,35.433 109.862,34.932 T2.2
NetC25_2: C25.2 R29.2 U2.11 | length 72.7
  Top Layer w0.3: v1(72.263,71.882) 72.263,57.785 73.406,56.642 91.567,56.642 v1(96.647,51.562)
  Bottom Layer w0.3: v1(72.263,71.882) 72.263,70.231 74.712,67.782 U2.11 ; R29.2 78.486,49.53 79.375,50.419 95.504,50.419 v1(96.647,51.562)
  Bottom Layer w0.5: C25.2@76.427,47.228 R29.2
NetC26_2: C26.2 R31.2 U2.10 | length 76.5
  Top Layer w0.3: v1(73.279,67.31) 73.183,67.214 73.183,58.296 74.075,57.404 92.075,57.404 94.869,54.61 v1(96.012,54.61)
  Bottom Layer w0.3: v1(73.279,67.31) 73.307,67.282 U2.10 ; C26.2 76.062,41.402 75.184,41.402 73.787,42.799 73.787,50.419 74.549,51.181 93.853,51.181 96.012,53.34 v1(96.012,54.61)
  Bottom Layer w0.5: C26.2@76.586,41.137 R31.2 R31.2@78.227,43.037
NetC29_2: C29.2 U2.31 U5.2 | length 70.7
  Top Layer w0.5: U5.2 50.419,76.962 50.038,76.581 C29.2 50.038,72.263 51.054,71.247 62.357,71.247 67.818,76.708 89.154,76.708 89.916,75.946 89.916,63.627 v1(90.932,62.611)
  Bottom Layer w0.3: U2.31 89.023,65.282 90.932,63.373 v1(90.932,62.611)
NetC29_3: C29.3 R40.1 U2.30 U5.3 | length 70.3
  Top Layer w0.5: U5.3 51.689,77.47 52.578,76.581 C29.3 52.578,73.025 53.34,72.263 61.976,72.263 67.437,77.724 89.535,77.724 91.313,75.946 v1(91.313,64.77)
  Bottom Layer w0.3: U2.30 90.682,65.782 91.44,65.024 91.313,64.897 v1(91.313,64.77)
  Bottom Layer w0.5: R40.1 52.07,77.216 52.578,76.708 C29.3
NetD1_1: D1.1 D2.1 SB1.2 | length 7.6
  Bottom Layer w0.5: SB1.2@44.541,63.044 D2.1@47.349,63.044 ; SB1.2@44.541,69.544 44.541,67.346 45.339,66.548 D1.1
NetD1_2: D1.2 R2.1 | length 2
  Bottom Layer w0.5: D1.2 R2.1@51.419,66.548
NetD3_1: D3.1 U2.12 | length 5.5
  Bottom Layer w0.3: D3.1 75.027,69.626 76.371,68.282 U2.12
NetD3_2: D3.2 R7.1 R9.2 U2.13 | length 28.4
  Top Layer w0.3: v1(83.185,86.868) 83.185,88.789 R9.2@83.439,89.043
  Bottom Layer w0.3: R7.1 77.327,87.106 78.486,88.265 82.55,88.265 83.185,87.63 v1(83.185,86.868) ; D3.2@77.597,71.785 R7.1@77.597,74.168 ; D3.2 78.613,71.755 79.165,71.203 U2.13
NetD5_1: D5.1 R28.2 R29.1 R35.2 | length 8.8
  Bottom Layer w0.5: R29.1 80.887,45.228 D5.1 80.899,45.974 81.534,46.609 83.296,46.609 R35.2 R28.2@85.439,48.752
NetD6_1: D6.1 R30.2 R31.1 R36.2 | length 8.7
  Bottom Layer w0.5: R31.1 80.899,41.037 ; D6.1 80.899,41.037 ; R30.2 83.471,41.037 R36.2 80.899,41.037
NetDA1_1: DA1.1 R43.2 | length 8.6
  Top Layer w0.5: R43.2 65.516,90.567 65.786,90.297 DA1.1
NetDA1_4: DA1.4 H1.1 R37.1 U2.33 U3.4 | length 138.7
  Top Layer w0.5: v1(42.418,72.644) 42.418,46.228 47.625,41.021 55.626,41.021 U3.4 ; DA1.4 90.805,79.502 93.345,76.962 93.345,64.262 v1(95.123,62.484)
  Bottom Layer w0.3: U2.33 87.991,64.282 88.519,63.754 88.519,61.468 89.662,60.325 93.218,60.325 95.123,62.23 v1(95.123,62.484)
  Bottom Layer w0.5: v1(42.418,72.644) 63.754,72.644 65.786,74.676 DA1.4 67.437,79.502 68.961,81.026 H1.1 R37.1@71.612,83.947
NetDA2_1: DA2.1 R39.1 | length 1.8
  Bottom Layer w0.5: R39.1 DA2.1
NetDA2_4: DA2.4 J5.5 R38.1 | length 18.4
  Bottom Layer w0.5: R38.1@50.022,98.044 57.15,98.044 57.912,97.282 J5.5 DA2.4
NetFU1_1: FU1.1 R18.1 Tr1.1 Vr1.1 | length 92.6
  Top Layer w1: R18.1@144.653,37.465 R18.1 ; Vr1.1@155.575,51.689 Vr1.1
  Bottom Layer w1: Tr1.1 121.612,51.435 133.858,51.435 ; R18.1 144.78,41.275 142.494,43.561 136.398,43.561 133.858,46.101 133.858,51.435 ; FU1.1 155.829,74.295 Vr1.1 133.858,51.435
NetFU1_2: FU1.2 K1.1 K2.2 | length 33.2
  Bottom Layer w1: K2.2 155.281,41.616 157.861,44.196 161.504,44.196 K1.1 163.997,46.014 165.989,48.006 165.989,55.245 164.592,56.642 FU1.2
NetIC2_2: IC2.2 T2.3 | length 12.4
  Top Layer w0.5: IC2.2 102.616,34.544 104.013,33.147 T2.3
NetIC2_4: IC2.4 R20.2 | length 2
  Bottom Layer w0.5: IC2.4 R20.2
NetIC2_5: IC2.5 R17.1 U2.4 | length 45.3
  Top Layer w0.5: v1(74.676,59.944) 74.676,59.309 75.565,58.42 92.456,58.42 94.234,56.642 v1(96.266,56.642) ; IC2.5 R17.1@102.616,51.07
  Bottom Layer w0.3: v1(74.676,59.944) 74.676,63.246 75.712,64.282 U2.4
  Bottom Layer w0.5: v1(96.266,56.642) 100.584,56.642 100.711,56.769 102.616,54.864 IC2.5
NetJ1_2: J1.2 R12.1 | length 4.3
  Top Layer w0.5: R12.1 J1.2
NetJ1_3: J1.3 R9.1 | length 4.3
  Top Layer w0.5: R9.1 J1.3
NetJ1_5: J1.5 R15.1 | length 4.2
  Top Layer w0.5: R15.1@88.265,91.424 J1.5
NetJ1_6: J1.6 R16.1 | length 4.3
  Top Layer w0.5: R16.1 J1.6
NetJ2_1: J2.1 U2.25 | length 30.9
  Bottom Layer w0.3: U2.25 94.444,68.282 97.282,71.12 97.282,84.455 99.06,86.233 J2.1
NetJ2_2: J2.2 U2.26 | length 28.8
  Bottom Layer w0.3: U2.26 94.96,67.782 98.298,71.12 98.298,82.423 99.568,83.693 J2.2
NetJ2_3: J2.3 U2.28 | length 37.4
  Bottom Layer w0.3: U2.28 97.262,66.782 100.457,69.977 104.013,69.977 104.902,70.866 104.902,73.406 104.14,74.168 100.203,74.168 99.314,75.057 99.314,80.391 100.076,81.153 J2.3
NetJ3_2: J3.2 R13.2 | length 2.8
  Bottom Layer w0.5: R13.2@98.806,65.024 J3.2
NetJ3_4: J3.4 R14.2 | length 4.1
  Bottom Layer w0.5: R14.2@97.52,59.944 J3.4
NetJ4_3: J4.3 T4.3 | length 22.6
  Top Layer w0.5: T4.3 56.007,33.02 v1(56.642,32.385)
  Bottom Layer w0.5: v1(56.642,32.385) 57.785,31.242 71.628,31.242 J4.3
NetJ4_4: J4.4 T3.3 | length 15.6
  Top Layer w0.5: T3.3@65.024,33.147 T3.3 65.158,37.218 66.548,38.608 73.66,38.608 74.422,37.846 J4.4
NetJ4_6: J4.6 R30.1 | length 12
  Bottom Layer w0.5: J4.6 76.962,37.973 77.978,38.989 84.836,38.989 85.471,39.624 R30.1
NetJ4_7: J4.7 R28.1 | length 19.6
  Bottom Layer w0.3: J4.7 80.772,35.306 80.772,37.338
  Bottom Layer w0.5: 80.772,37.338 81.534,38.1 85.09,38.1 87.106,40.116 87.106,46.752 R28.1
NetJ4_8: J4.8 R11.1 U2.29 | length 85.3
  Top Layer w0.3: R11.1@79.502,42.053 80.629,43.18 95.377,43.18 96.012,43.815 96.012,44.323 98.933,47.244 106.172,47.244 107.315,48.387 107.315,71.374 105.791,72.898 101.473,72.898 94.742,66.167 v1(94.742,65.278)
  Top Layer w0.5: J4.8 R11.1@79.502,42.053
  Bottom Layer w0.3: U2.29 91.96,66.282 92.964,65.278 v1(94.742,65.278)
NetJ4_11: J4.11 R26.1 | length 8.9
  Top Layer w0.3: 83.312,35.941 83.312,37.338
  Top Layer w0.5: 83.312,35.941 83.312,35.306 J4.11 ; 83.312,37.338 83.312,38.989 84.201,39.878 R26.1
NetJ4_12: J4.12 R27.1 | length 6.3
  Top Layer w0.5: J4.12 84.582,38.354 86.614,40.386 R27.1
NetJ4_13: J4.13 R32.1 | length 10.6
  Top Layer w0.3: 85.852,35.433 85.852,37.211
  Top Layer w0.5: 85.852,35.433 J4.13@87.122,34.163 ; 85.852,37.211 85.852,38.1 86.995,39.243 88.392,39.243 89.154,40.005 R32.1
NetJ4_14: J4.14 R33.1 | length 8.8
  Top Layer w0.5: J4.14 87.122,37.719 87.757,38.354 90.17,38.354 91.694,39.878 R33.1
NetJ4_15: J4.15 R34.1 | length 11.3
  Top Layer w0.5: J4.15 92.075,34.036 94.234,36.195 R34.1
NetJ5_2: J5.2 R41.1 | length 4.6
  Top Layer w0.5: R41.1 J5.2
NetJ5_3: J5.3 R42.1 | length 4.5
  Top Layer w0.5: R42.1 J5.3@52.705,95.504
NetJ5_6: J5.6 R43.1 | length 3.1
  Top Layer w0.5: J5.6 R43.1
NetK1_2: K1.2 K2.1 R21.1 Tr1.5 Vr1.2 | length 42.2
  Top Layer w0.254: K1.2@162.941,50.8 162.941,51.395 K1.2
  Bottom Layer w1: Tr1.5 144.072,46.355 150.241,46.355 ; R21.1 148.376,32.639 K2.1 150.281,46.315 150.241,46.355 ; K1.2 160.488,51.014 Vr1.2 150.241,46.355
NetLD1_1: LD1.1 R26.2 | length 2.2
  Top Layer w0.5: R26.2 LD1.1
NetLD1_2: LD1.2 U2.43 | length 14.6
  Top Layer w0.3: v1(82.55,53.467) 83.058,53.467 84.201,52.324 LD1.2
  Bottom Layer w0.3: U2.43 81.665,54.352 v1(82.55,53.467)
NetLD2_1: LD2.1 R27.2 | length 2.2
  Top Layer w0.5: R27.2 LD2.1
NetLD2_2: LD2.2 U2.42 | length 15.1
  Top Layer w0.3: v1(84.709,53.467) 86.614,51.562 LD2.2
  Bottom Layer w0.3: U2.42 82.165,56.011 v1(84.709,53.467)
NetLD3_1: LD3.1 R32.2 | length 2.2
  Top Layer w0.5: R32.2 LD3.1
NetLD3_2: LD3.2 U2.41 | length 16.7
  Top Layer w0.3: v1@87.249,53.34 89.154,51.435 LD3.2
  Bottom Layer w0.3: U2.41 82.665,56.654 84.833,54.486 86.103,54.486 v1@87.249,53.34
  other v1: 87.249,53.467
NetLD4_1: LD4.1 R33.2 | length 2.2
  Top Layer w0.5: R33.2 LD4.1
NetLD4_2: LD4.2 U2.40 | length 18.6
  Top Layer w0.3: v1@89.916,53.34 91.694,51.562 LD4.2
  Bottom Layer w0.3: U2.40 83.165,57.043 85.09,55.118 88.138,55.118 v1@89.916,53.34
  other v1: 89.916,53.467
NetLD5_1: LD5.1 R34.2 | length 2.2
  Top Layer w0.5: R34.2 LD5.1
NetLD5_2: LD5.2 U2.39 | length 20.5
  Top Layer w0.3: v1@92.583,53.34 94.234,51.689 LD5.2
  Bottom Layer w0.3: U2.39 83.665,57.432 85.344,55.753 90.17,55.753 v1@92.583,53.34
  other v1: 92.583,53.467
NetR1_1: R1.1 R3.2 T1.1 | length 7.4
  Top Layer w0.5: T1.1 50.607,66.736 51.038,67.167 R1.1 54.229,68.199 v1(54.356,68.326)
  Bottom Layer w0.5: R3.2 v1(54.356,68.326)
NetR4_1: R4.1 U1.6 U2.45 | length 30.3
  Top Layer w0.5: R4.1 66.167,48.387 65.532,49.022 v1(65.532,52.705) 77.597,52.705 v1(78.232,53.34)
  Bottom Layer w0.3: v1(78.232,53.34) 78.232,55.372 80.665,57.805 U2.45
  Bottom Layer w0.5: U1.6 v1(65.532,52.705)
NetR5_1: R5.1 U1.5 U2.46 | length 33.8
  Top Layer w0.5: R5.1 66.421,45.974 63.119,49.276 v1(63.119,52.578) 63.119,53.467 63.881,54.229 v1(75.692,54.229)
  Bottom Layer w0.3: v1(75.692,54.229) 77.343,55.88 77.597,55.88 80.165,58.448 U2.46
  Bottom Layer w0.5: v1(63.119,52.578) U1.5@64.262,51.435
NetR6_2: R6.2 T1.3 U2.44 | length 44.2
  Top Layer w0.3: v1(49.657,57.277) R6.2@49.657,61.452 ; v1(55.88,55.372) 79.883,55.372 v1(80.01,55.499)
  Top Layer w0.5: R6.2 T1.3@49.641,63.858
  Bottom Layer w0.3: v1(49.657,57.277) 51.562,55.372 v1(55.88,55.372) ; v1(80.01,55.499) 80.01,55.626 81.165,56.781 U2.44
NetR8_1: R8.1 U2.20 | length 7
  Bottom Layer w0.3: U2.20 82.665,74.918 83.185,75.438 R8.1
NetR10_1: R10.1 R12.2 U2.14 | length 22.1
  Top Layer w0.3: v1@80.645,86.487 R12.2
  Top Layer w0.5: R10.1@78.708,89.297 R12.2
  Bottom Layer w0.3: U2.14 79.665,83.983 80.645,84.963 v1@80.645,86.487
  other v1: 80.645,86.868
NetR13_1: R13.1 U2.37 | length 20.5
  Bottom Layer w0.3: U2.37 84.665,59.353 85.681,58.337 95.421,58.337 96.393,59.309 96.393,63.5 96.647,63.754 96.663,63.754 R13.1
NetR14_1: R14.1 U2.34 | length 12.8
  Bottom Layer w0.3: U2.34 87.348,63.782 87.757,63.373 87.757,60.833 88.9,59.69 95.012,59.69 R14.1
NetR22_1: R22.1 R24.2 T3.1 | length 3.9
  Top Layer w0.5: R22.1@60.706,35.83 R24.2 60.756,34.097 T3.1
NetR22_2: R22.2 U2.27 | length 99.9
  Top Layer w0.3: v1(101.727,57.531) 104.775,57.531 106.807,59.563 106.807,70.358 105.664,71.501 v1(102.743,71.501)
  Top Layer w0.5: R22.2 v1(60.706,40.386)
  Bottom Layer w0.3: v1(60.706,40.386) 61.722,41.402 71.755,41.402 72.898,42.545 72.898,50.927 73.914,51.943 93.091,51.943 93.98,52.832 93.98,53.975 92.837,55.118 92.837,57.15 93.345,57.658 101.6,57.658 v1(101.727,57.531) ; U2.27 96.365,67.282 100.584,71.501 v1(102.743,71.501)
NetR23_1: R23.1 R25.2 T4.1 | length 3.5
  Top Layer w0.5: R23.1 R25.2 49.326,33.97 T4.1
NetR23_2: R23.2 U3.6 | length 13.2
  Top Layer w0.5: R23.2 49.276,38.608 49.784,39.116 57.277,39.116 58.166,40.005 U3.6
NetR39_2: R39.2 U2.32 U3.1 U3.2 | length 130.6
  Top Layer w0.5: U3.2 U3.1 47.937,42.487 46.736,43.688 46.736,49.657 48.566,51.487 48.566,62.559 46.163,64.962 46.163,78.805 45.085,79.883 45.085,81.788 45.974,82.677 60.325,82.677 61.652,81.35 61.652,77.597 ; v1(61.665,75.749) 61.652,75.749 61.652,77.597 ; v1(92.837,61.468) 92.837,62.992 92.456,63.373 92.456,76.327 90.17,78.613 66.929,78.613 65.913,77.597 61.652,77.597
  Bottom Layer w0.3: U2.32 88.634,64.782 89.281,64.135 89.281,62.23 90.17,61.341 92.71,61.341 v1(92.837,61.468)
  Bottom Layer w0.5: R39.2@57.953,75.749 v1(61.665,75.749)
NetR41_2: R41.2 U5.7 | length 4.7
  Top Layer w0.5: R41.2 50.292,86.868 50.419,86.741 U5.7
NetR42_2: R42.2 U5.6 | length 5
  Top Layer w0.5: U5.6 51.689,86.995 52.705,88.011 R42.2
NetU3_3: U3.3 U3.5 | length 6.1
  Top Layer w0.5: U3.3 54.356,44.069 54.864,44.577 56.388,44.577 56.896,44.069 U3.5
VCCP: C27.1 J5.1 R38.2 U5.8 | length 19.2
  Top Layer w0.5: J5.1 47.752,85.839 U5.8
  Bottom Layer w0.5: R38.2@47.752,97.774 J5.1 47.879,95.758 47.879,91.937 C27.1
pads on no net: B1.1 B2.1 B3.1 B4.1 IC2.3 IC2.6 J4.16 Tr1.2 Tr1.3 Tr1.4 Tr1.6 Tr1.8 Tr1.10 U2.2 U2.3 U2.17 U2.18 U2.19 U2.21 U2.22 U2.38 U3.8 U3.11

## Polygon pours and split planes (outlines as drawn)
GND on Bottom Layer "Bottom Layer-GND" (solid, remove dead copper, pour order 4): 38.481,79.502 41.148,82.169 64.77,82.169 64.77,84.328 68.326,87.884 69.723,89.281 69.723,99.568 155.321,99.568 157.099,97.79 157.099,80.137 157.099,79.883 153.797,76.581 153.162,75.946 114.808,75.946 114.808,49.784 109.982,44.958 109.347,45.593 99.568,45.593 99.568,45.339 97.155,42.926 97.028,42.799 97.028,30.48 41.148,30.48 38.481,33.147
GND on Top Layer "Top Layer-GND" (solid, remove dead copper, pour order 3): 38.481,79.502 41.148,82.169 64.77,82.169 64.77,84.328 68.326,87.884 69.723,89.281 69.723,99.568 155.321,99.568 157.099,97.79 157.099,80.137 157.099,79.883 153.797,76.581 153.162,75.946 114.808,75.946 114.808,49.784 109.982,44.958 109.347,45.593 99.568,45.593 99.568,45.339 97.155,42.926 97.028,42.799 97.028,30.48 41.148,30.48 38.481,33.147

## Silkscreen, mask and mechanical layers (free items; w line width, h text height)
Top Overlay:
  text "CM UART" at 62.865,97.282 h1.52
  text "Cooling module" at 93.472,95.123 h1.52
  text "Leds" at 97.155,78.232 h1.52 r90
  text "Spirt controller v 2.0" at 61.468,75.057 h1.52
  text "Boot" at 40.005,74.041 h1.52
  text "Debug" at 47.752,70.739 h1.52
  text "SWD" at 97.155,61.976 h1.52 r90
  text "Power module" at 54.483,58.674 h1.52
  text "CPU PCB v. 1.0" at 54.483,56.007 h1.52
  text "Nikopol (C)" at 54.483,53.34 h1.52
  text "Reset" at 39.624,48.387 h1.52
Mechanical 1:
  circle w0.254: c163,85 r1.6
  circle w0.254: c163,40 r1.6
  circle w0.254: c43,40 r1.6
  circle w0.254: c43,85 r1.6
  lines w0.254: 38,30 38,100 168,100 168,30 38,30

## Text inside footprints (layer, text, board x,y; h text height)
J1: Top Overlay "1" at 77.885,97.026 h1; Mechanical 14 "1" at 77.885,97.026 h1
J2: Top Overlay "1" at 103,86.453 h1 r270; Mechanical 14 "1" at 103,86.453 h1 r270
J3: Top Overlay "1" at 102.995,67.774 h1 r270; Mechanical 14 "1" at 102.995,67.774 h1 r270
J4: Top Overlay "16" at 89.027,37.973 h1.02; Mechanical 14 "16" at 89.027,37.973 h1.02
J5: Top Overlay "1" at 47.532,97.026 h1; Mechanical 14 "1" at 47.532,97.026 h1
Tr1: Top Overlay "220V" at 132.802,55.825 h3 r180; Top Overlay "9V" at 131.302,67.325 h3 r180